# Altium PCB PCB1.PcbDoc
Units mm, origin at the board's own origin, x right, y up, seen from the top; angles counter-clockwise.
Board outline 58 x 22.4 mm, 2 copper layers (Top Layer, Bottom Layer); 53 components, 37 nets, 181 pads, 38 vias.
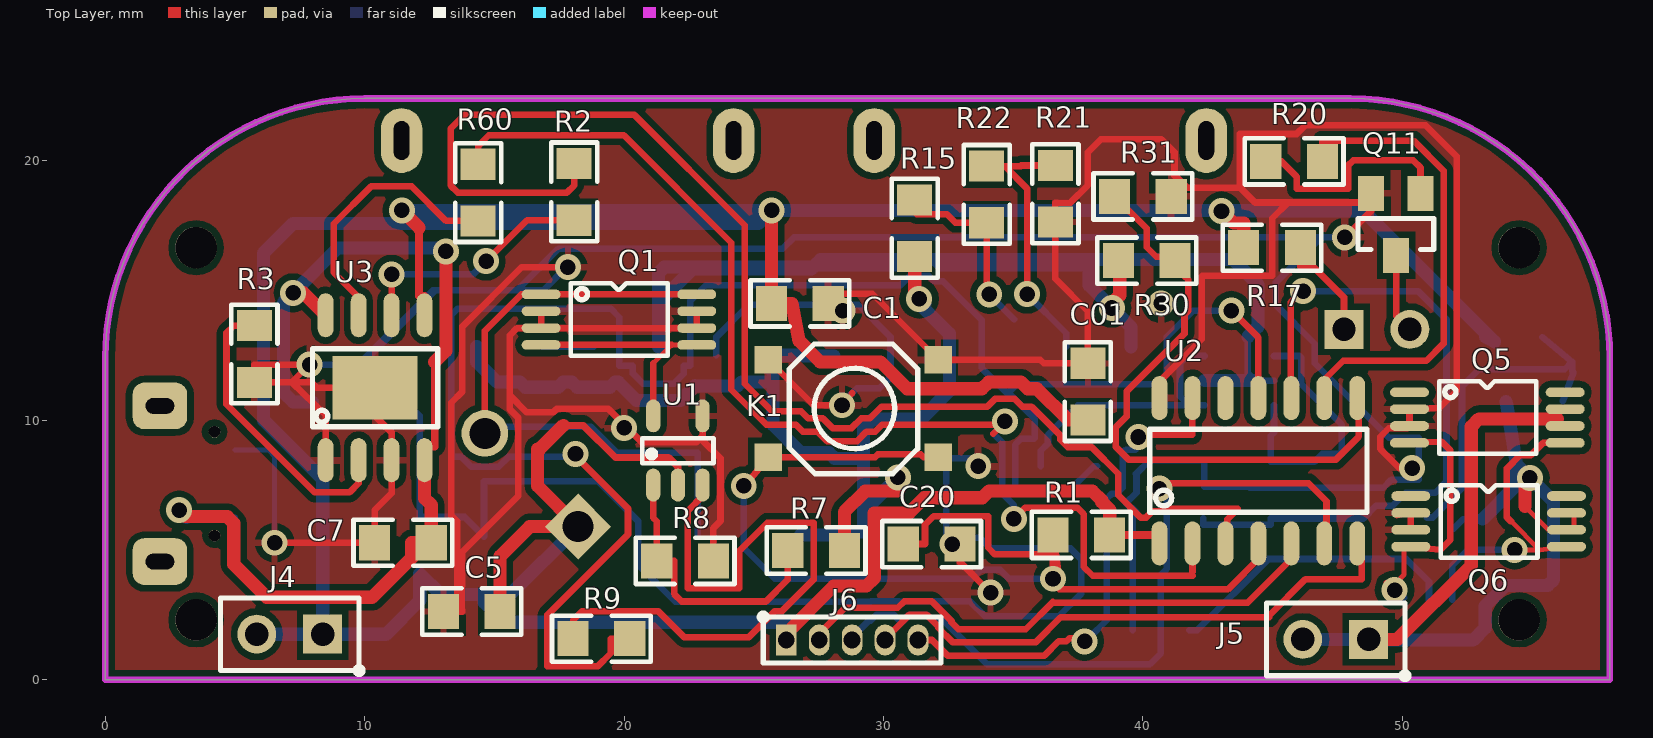
[diagram p0: Top Layer view]
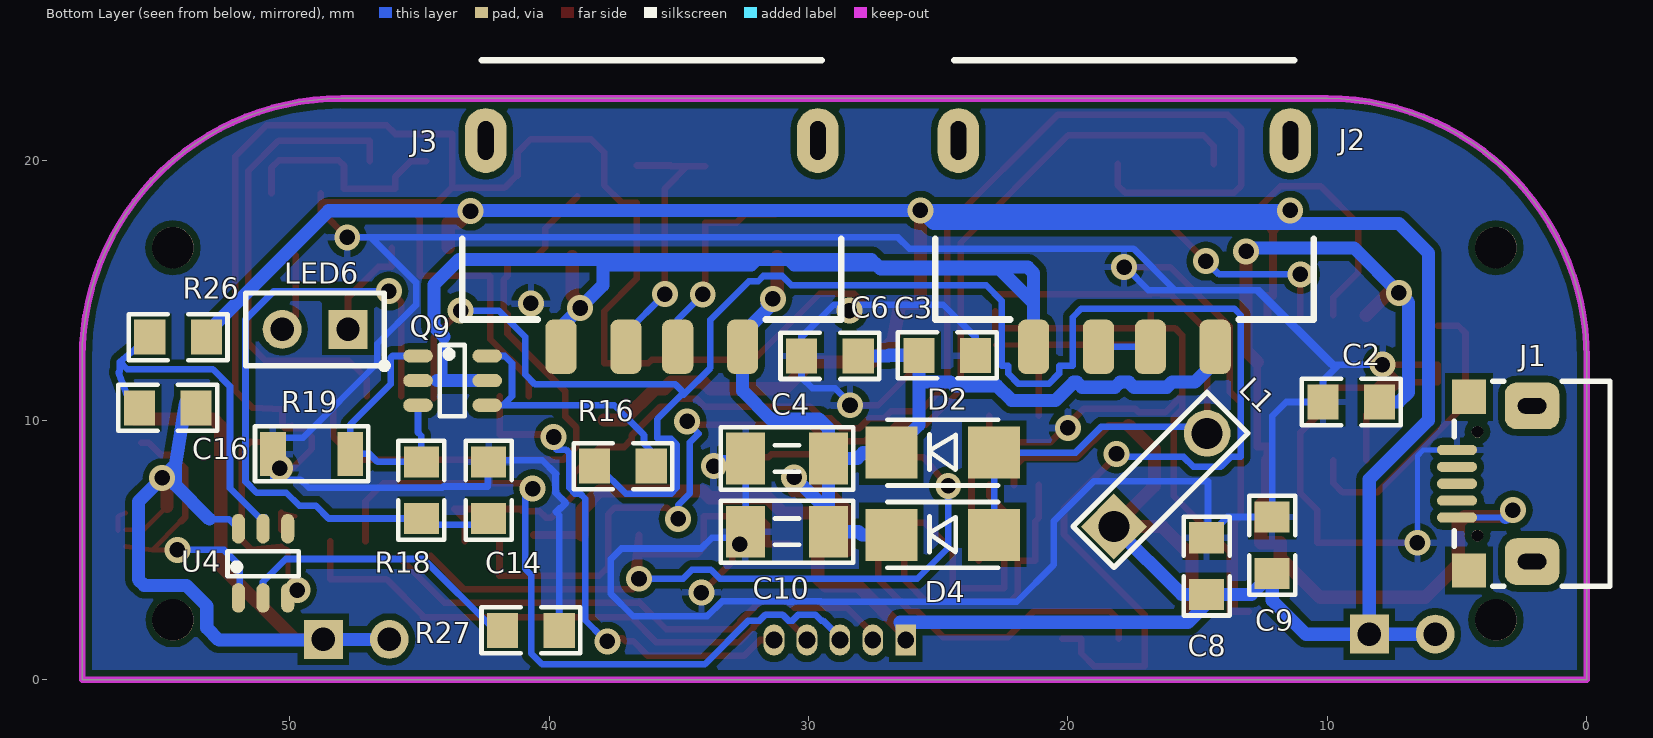
[diagram p1: Bottom Layer view, seen from below]

## Layer stack, top to bottom
Top Layer: signal copper 0.0356
Dielectric: dielectric 0.32, FR-4, Dk 4.8
Bottom Layer: signal copper 0.0356

## Board outline
0,0 58,0 58,12.4 ccw(c48,12.4) 48,22.4 10,22.4 ccw(c10,12.4) 0,12.4

## Design rules (kind name [scope] priority, off if disabled: settings)
Clearance [All] p1: gap=0.254
PolygonConnect [All] p1: connectstyle=Relief reliefconductorwidth=0.254 reliefentries=4 polygonreliefangle="90 Angle"
RoutingVias [All] p1: holewidth=0.6 width=1 viastyle="Through Hole" minholewidth=0.6 minwidth=1 maxholewidth=0.6 maxwidth=1
SMDNeckDown [All] p1: percent=50.000
SilkToSilkClearance [All] p1: silktosilkclearance=0.01
SilkscreenOverComponentPads [All] p1: minsilkscreentomaskgap=0.01
SolderMaskExpansion [All] p1: expansion=0.102
Width Width_Power [InNet('B+') or InNet('B-') or InNet('VBUS') or InNet('MiVCC') or InNet('T3') or InNet('T2') or InNet('VSWC')] p1: maxlimit=0.508 minlimit=0.508 preferedwidth=0.508 minimp=50.000000 maximp=50.000000 favimp=50.000000
Width [All] p2: maxlimit=0.254 minlimit=0.254 preferedwidth=0.254
26 further rules are at their usual default settings.

## Components (designator, comment, footprint, x,y, rotation, side; value= is the part's Value field where it differs from the comment)
C01 "10UF" 0805 37.875,11.1 r90 top locked
C1 "4.7UF" 0805 26.775,14.5 r0 top locked
C2 "120NF" 0805 9.075,10.7 r180 bottom locked
C3 "4.7UF" 0805 24.65,12.5 r0 bottom locked
C4 "47UF" 1210C 30.825,8.525 r0 bottom locked
C5 "120NF" 0805 14.125,2.625 r0 top locked
C6 "4.7UF" 0805 29.175,12.475 r180 bottom locked
C7 "4.7UF" 0805 11.475,5.275 r0 top locked
C8 "1.7UF" 0805 14.65,4.375 r270 bottom locked
C9 "4.7UF" 0805 12.125,5.175 r270 bottom locked
C10 "47UF" 1210C 30.825,5.7 r0 bottom locked
C14 "120NF" 0805 42.325,7.3 r270 bottom locked
C16 "120NF" 0805 54.7,10.475 r180 bottom
C20 "120NF" 0805 31.85,5.225 r180 top locked
D2 "1N5822" DO-214AA 24.825,8.75 r180 bottom locked
D4 "1N5822" DO-214AA 24.825,5.575 r180 bottom locked
J1 "miniusb" microusb4 5,7.55 r270 bottom locked
J2 "USB-A_1A" USB-A3 25.12,13.88 r180 bottom locked
J3 "USB-A_2A" USB-A3 43.34,13.88 r180 bottom locked
J4 "" PIN2 8.38,1.75 r180 top locked
J5 "" PIN2 48.7,1.55 r180 top locked
J6 "PIN5" PIN5_50 26.25,1.525 r0 top
K1 "SW-PB" KEY_Press0 28.83,10.45 r180 top locked
L1 "3.3UH" Inductor2 18.225,5.9 r135 bottom locked
LED6 "" PIN2 47.75,13.5 r0 bottom locked
Q1 "8205A_1" TSSOP8 19.8,13.875 r270 top locked
Q5 "8205A" TSSOP8 53.275,10.1 r270 top locked
Q6 "8205A" TSSOP8 53.325,6.1 r270 top locked
Q9 "8205S" SOT23-6 45.05,11.525 r270 bottom locked
Q11 "8050" SOT23 49.175,17.75 r0 top locked
R1 "10K" 0805 37.625,5.575 r0 top locked
R2 "1K" 0805 18.075,18.8 r90 top locked
R3 "1.3K" 0805 5.75,12.55 r90 top locked
R7 "100K" 0805 27.4,4.975 r0 top locked
R8 "33K" 0805 22.35,4.575 r180 top locked
R9 "1K" 0805 19.125,1.575 r180 top locked
R15 "120K" 0805 31.2,17.4 r90 top locked
R16 "1K" 0805 37.15,8.225 r180 bottom locked
R17 "100" 0805 44.975,16.65 r0 top locked
R18 "1K" 0805 44.925,7.3 r270 bottom locked
R19 "0.05R" 1206R 49.15,8.7 r180 bottom locked
R20 "1K" 0805 45.825,19.975 r180 top locked
R21 "100K" 0805 36.625,18.725 r90 top locked
R22 "39K" 0805 33.975,18.7 r270 top locked
R26 "100R" 0805 54.3,13.2 r180 bottom
R27 "1K" 0805 40.7,1.9 r0 bottom locked
R30 "1K" 0805 40.15,16.15 r0 top locked
R31 "43K" 0805 40,18.625 r0 top locked
R60 "1K" 0805 14.375,18.775 r90 top locked
U1 "ME2139" SOT23-5 22.075,7.5 r0 top locked
U2 "SN8P2711" SOP14 44.45,8.05 r0 top locked
U3 "AP5056" SOP8 10.4,11.25 r0 top locked
U4 "DW01" SOT23-6 51.025,3.15 r180 bottom

## Footprints (in the part's own frame and the unit in brackets; to place one, negate y for a bottom-side part, rotate by r counter-clockwise, add the part's x,y. Pads: shape width x height; smd on the part's side, far side on the other; paste and mask are expansions set on the pad)
0805 [mm]
  rect 1.2x1.35 smd: 1(-1.092,0) 2(1.092,0)
  silkscreen extent -1.9,-0.89 1.91,0.89
1206R [mm]
  rect 1x1.7 smd: 1(-1.486,0) 2(1.486,0)
  silkscreen extent -2.18,-1.05 2.18,1.07
1210C [mm]
  rect 1.5x2 smd: 1(-1.6,0) 2(1.6,0)
  silkscreen extent -2.55,-1.2 2.55,1.2
DO-214AA [mm]
  rect 2x2 smd: 1(1.981,0) 2(-1.981,0)
  silkscreen extent -2.13,-1.27 2.13,1.27
Inductor2 [mm]
  rect 1.8x1.8 hole 1.2: 1(0,0)
  round 1.8 hole 1.2: 2(5.08,0)
  silkscreen extent -1.12,-1.12 6.2,1.12
KEY_Press0 [mm]
  rect 1.05x1.05 smd: 1(-3.277,1.88) 1(3.277,1.88) 2(-3.277,-1.88) 2(3.277,-1.88)
  silkscreen extent -2.49,-2.49 2.46,2.51
microusb4 [mm]
  rect 1.32x1.32 smd: 0(-3.349,0.46) 0(3.349,0.46)
  rrect50% 1.8x2.1 hole 0.6 slot 1.1 at 90 deg: 0(-3,2.894) 0(3,2.894)
  oval 0.4x1.55 smd: 1(1.302,0) 3(0,0) 5(-1.302,0)
  oval 0.39x1.55 smd: 2(0.651,0) 4(-0.651,0)
  round 0.45 hole 0.45: Hole(-2,0.788) Hole(2,0.788)
  silkscreen extent -3.95,-0.11 3.95,5.89
PIN2 [mm]
  rect 1.5x1.5 hole 0.9: 1(0,0)
  round 1.5 hole 0.9: 2(2.54,0)
  silkscreen extent -1.53,-1.4 3.94,1.52
PIN5_50 [mm]
  rect 0.8x1.2 hole 0.65: 1(0,0)
  oval 0.8x1.2 hole 0.65: 2(1.27,0) 3(2.54,0) 4(3.81,0) 5(5.08,0)
  silkscreen extent -1.01,-0.89 5.97,1.01
SOP8 [mm]
  rect 3.28x2.45 smd: 0(0,0)
  oval 0.61x1.7 smd: 1(-1.905,-2.794) 2(-0.635,-2.794) 3(0.635,-2.794) 4(1.905,-2.794) 5(1.905,2.794) 6(0.635,2.794) 7(-0.635,2.794) 8(-1.905,2.794)
  silkscreen extent -2.41,-1.5 2.41,1.5
SOP14 [mm]
  oval 0.61x1.7 smd: 1(-3.81,-2.8) 2(-2.54,-2.8) 3(-1.27,-2.8) 4(0,-2.8) 5(1.27,-2.8) 6(2.54,-2.8) 7(3.81,-2.8) 8(3.81,2.8) 9(2.54,2.8) 10(1.27,2.8) 11(0,2.8) 12(-1.27,2.8) 13(-2.54,2.8) 14(-3.81,2.8)
  silkscreen extent -4.19,-1.6 4.19,1.6
SOT23 [mm] "NPN"
  rect 1x1.35 smd: 1(1.524,0.991) 2(-0.381,0.991) 3(0.584,-1.397)
  silkscreen extent -0.89,-1.17 2.03,0.03
SOT23-5 [mm]
  oval 0.55x1.27 smd: 1(-0.95,0) 2(0,0) 3(0.95,0) 4(0.95,2.667) 5(-0.95,2.668)
  silkscreen extent -1.37,0.84 1.37,1.8
SOT23-6 [mil]
  oval 20x45 smd: 1(-37.4,0) 2(0,0) 3(37.4,0) 4(37.4,105) 5(0,105) 6(-37.4,105)
  silkscreen extent -54,33 54,71
TSSOP8 [mm]
  oval 0.37x1.5 smd: 1(-0.975,-3) 2(-0.325,-3) 3(0.325,-3) 4(0.975,-3) 5(0.975,3) 6(0.325,3) 7(-0.325,3) 8(-0.975,3)
  silkscreen extent -1.4,-1.85 1.4,1.88
USB-A3 [mm]
  rrect50% 1.2x2.1 smd: 1(10.8,-1.05) 2(8.3,-1.05) 3(6.3,-1.05) 4(3.8,-1.05)
  oval 1.6x2.5 hole 0.6 slot 1.5 at 90 deg: ""(0.9,6.9) ""(13.7,6.9)
  silkscreen extent 0,0 14.6,10

## Part data
C01 C1 C2 C3 C4 C5 C6 C7 C8 C9 C10 C14 C16 C20: library part Cap, "Capacitor"
D2 D4: library part "Diode BAT18", "Low-Loss RF Switching Diode"
J2 J3: library part USB-A
J4 J5: library part "Header 2", "Header, 2-Pin"
K1: "Switch"
L1: library part Inductor, "Inductor"
LED6: library part LED0, "Typical INFRARED GaAs LED"
Q11: library part NPN, "NPN Bipolar Transistor"
R1 R2 R3 R7 R8 R9 R15 R16 R17 R18 R19 R20 R21 R22 R26 R27 R30 R31 R60: library part Res2, "Resistor"
U2: library part SN8P2711BSG

## Free pads (board coordinates)
  round 1.6 hole 1.6: 1(3.5,2.3) 2(54.5,2.3) 3(54.5,16.65) 4(3.5,16.65)

## Via types
v1: diameter 1, hole 0.6, Top Layer to Bottom Layer, 38 vias

## Nets (pads, with @x,y where several pads share a name; then routed paths per layer and width w, separated by ;. In a path a pad name is that pad's centre, name@x,y a point inside that pad or via, vN(x,y) a via of type N, cw(c..) or ccw(c..) an arc to the next point about the centre after c; other vN are vias at no path point)
B+: C01.1 C1.1 C5.2 C8.2 C9.2 J4.1 J4.2 J6.1 L1.1 R1.2 R17.1 R26.2 U1.2 U2.1 U3.5 | length 175.2
  Top Layer w0.275: 17.659,9.8 18.427,9.8 19.668,8.56 21.717,8.56 22.075,8.202 U1.2
  Top Layer w0.305: 12.098,17.417 12.098,14.78 12.305,14.78 U3.5 ; R1.2 U2.1@40.575,5.575
  Top Layer w0.508: v1(11.43,18.085) 12.098,17.417 ; C5.2 15.217,4.752 16.365,5.9 L1.1 16.662,7.463 16.662,8.89 16.749,8.89 17.659,9.8 ; v1(25.683,18.085) C1.1 26.47,14.5 26.746,13.055 27.559,12.242 29.887,12.242 30.917,11.211 33.794,11.211 34.049,11.466 35.305,11.466 35.56,11.211 35.912,11.211 37.115,10.008 C01.1 ; J6.1 26.25,1.775 28.082,3.607 29.337,3.607 29.642,3.912 29.642,6.426 30.988,6.426 31.572,7.01 33.803,7.01 34.06,7.266 38.055,7.266 38.409,6.912 38.409,6.847 38.717,6.539 R1.2 ; v1(43.028,18.059) 43.485,17.602 43.883,17.602 R17.1
  Bottom Layer w0.508: J4.2 J4.1 ; v1(11.43,18.085) v1(25.683,18.085) ; C8.2@14.6,2.977 15.367,2.21 26.46,2.21 J6.1 ; L1.1 15.608,3.283 C8.2 12.925,3.283 C9.2 12.125,3.048 10.827,1.75 J4.1 ; v1(43.028,18.059) 48.514,18.059 ; R26.2 53.548,13.025 48.514,18.059 ; J4.1 8.38,7.724 6.104,10 6.104,16.448 7.239,17.583 25.181,17.583 v1(25.683,18.085) ; v1(25.683,18.085) 48.489,18.085 48.514,18.059
B-: C16.2 J5.1 J5.2 Q5.6 Q5.7 Q6.6 Q6.7 U4.6 | length 40.5
  Top Layer w0.185: 54.725,6.678 55.628,5.775 Q6.6 ; Q6.7 56.617,6.3 Q6.6@56.617,5.75
  Top Layer w0.508: J5.1 49.81,1.55 52.654,4.394 52.654,9.754 52.951,10.05 55.975,10.05 ; 54.725,6.678 54.725,7.588 v1(54.912,7.775)
  Bottom Layer w0.254: U4.6 52.345,6.187 53.09,6.187
  Bottom Layer w0.508: J5.2 J5.1 48.726,1.524 52.724,1.524 53.192,1.992 53.192,2.842 53.98,3.63 55.605,3.63 55.829,3.854 55.829,6.858 v1(54.912,7.775) 54.408,8.279 ; 53.09,6.187 54.408,7.504 54.408,8.279 ; C16.2@54,10.725 54.03,10.545 54.408,8.279
GND: C1.2 C01.2 C2.1 C3.1 C4.2 C5.1 C6.1 C7.1 C8.1 C9.1 C10.2 C14.1 C20.1 J1.5 K1.2 Q1.2 Q1.3 Q1.6 Q1.7 Q5.2 Q5.3 Q6.2 Q6.3 Q11.2 R3.1 R8.1 R19.1 R21.1 R27.1 R31.2 U1.4 U2.14 U3.0 U3.1 U3.3 | length 302.5
  Top Layer w0.185: Q6.2@49.783,6.3 Q6.2 ; Q5.3@49.906,9.825 Q5.3
  Top Layer w0.254: v1(6.528,5.275) C7.1 10.383,6.528 11.035,7.18 U3.3 11.035,9.525 10.4,10.16 U3.0 8.158,11.25 7.95,11.458 7.191,11.458 ; U3.1 8.495,10.202 7.191,11.458 ; Q1.2 Q1.3 ; v1(17.831,15.9) 16.053,15.9 13.767,13.614 13.767,11.1 13.335,10.668 13.335,6.325 13.564,6.096 C5.1@13.564,2.625 ; Q1.7 Q1.6 Q1.3 ; U1.4 23.025,9.398 ; R8.1 23.442,5.84 23.717,6.115 23.717,8.528 23.025,9.22 23.025,9.398 ; K1.2@25.553,12.33 27.308,10.575 v1(28.4,10.575) ; C1.2 28.242,14.875 29.562,14.875 32.107,12.33 36.035,12.33 36.173,12.192 C01.2 37.875,14.2 36.625,15.45 R21.1 36.625,18.388 37.209,18.388 37.871,19.05 37.871,20.32 38.379,20.828 40.709,20.828 41.217,20.32 41.217,19.425 41.25,19.425 41.723,18.952 43.761,18.952 ; 28.776,11.026 28.801,11.05 ; C20.1 32.942,4.533 v1(34.125,3.35) ; U2.14@40.775,10.925 40.775,11.627 42.266,13.117 42.266,15.545 42.291,15.57 44.983,15.57 44.983,17.78 45.593,18.39 ; v1(47.778,17.043) 48.794,18.059 Q11.2@48.794,18.39 ; Q11.2 Q11.2@48.794,18.39 ; v1@49.885,8.15 49.144,8.891 49.144,9.359 49.476,9.691 50.191,9.691 Q5.3 Q5.2 51.435,10.475 52.095,11.135 52.095,20.168 50.902,21.361 46.253,21.361 45.923,21.031 43.739,21.031 43.739,18.974 43.761,18.952 ; Q6.3 Q6.2 ; 7.191,11.458 R3.1 5.75,12.141 v1(7.874,12.141) 7.191,11.458 ; C5.1@13.564,2.625 13.564,2.616 13.033,2.616 C5.1 C5.1@13.564,2.625 ; C5.1@13.564,2.625 13.767,2.625 13.767,4.928 15.926,7.087 15.926,10.084 15.596,10.414 15.596,10.947 ; 15.596,10.947 16.243,10.3 17.261,10.3 17.396,10.435 19.395,10.435 20.686,9.144 22.771,9.144 23.025,9.398 ; 15.596,10.947 15.596,13.271 15.875,13.55 Q1.3 ; 43.761,18.952 44.323,18.39 45.593,18.39 ; 45.593,18.39 Q11.2@48.794,18.39
  Bottom Layer w0.2: J1.5 6.299,8.852 6.528,8.623 v1(6.528,5.275)
  Bottom Layer w0.254: v1(7.874,12.141) 9.55,12.141 ; v1(17.831,15.9) 17.78,15.9 16.891,15.011 15.875,15.011 ; C3.1 23.558,13.208 24.803,14.453 29.022,14.453 30.267,13.208 C6.1 30.267,11.649 29.845,11.227 28.978,11.227 v1@28.363,10.612 ; v1(33.65,8.225) 33.35,8.525 C4.2 C10.2 32.425,5.461 33.731,5.461 34.138,5.055 37.211,5.055 37.617,4.648 37.617,3.302 36.754,2.438 33.909,2.438 33.333,3.014 30.796,3.014 30.779,2.997 30.611,2.997 30.594,3.014 29.526,3.014 29.509,2.997 21.971,2.997 20.549,4.42 20.549,6.096 18.995,7.65 14.6,7.65 14.6,5.517 13.85,6.267 C9.1 12.125,10.16 11.585,10.7 C2.1 10.167,11.525 9.55,12.141 ; R27.1 39.608,6.339 39.731,6.462 39.599,6.594 39.56,6.594 39.352,6.802 39.731,7.182 ; 39.731,7.93 39.75,7.949 ; 39.75,7.202 39.75,7.949 ; C14.1 C14.1@42.342,8.392 ; v1(47.778,17.043) 46.863,17.043 ; 9.55,12.141 9.754,12.141 ; 9.754,12.141 9.855,12.141 12.725,15.011 ; 9.754,12.141 12.624,15.011 12.725,15.011 ; 12.725,15.011 15.875,15.011 ; 15.875,15.011 17.475,16.612 26.111,16.612 26.543,17.043 46.863,17.043 ; 39.75,7.949 40.259,8.458 42.342,8.458 C14.1@42.342,8.392 ; C14.1@42.342,8.392 42.367,8.392 42.367,7.442 44.069,7.442 44.12,7.391 49.266,7.391 49.586,7.711 50.636,7.711 R19.1 50.636,9.325 49.486,9.325 46.619,12.192 46.619,12.944 45.125,14.438 45.125,15.305 46.863,17.043
  other v1: 32.65,5.225 50.375,8.15 20,9.7 28.425,14.225 40.7,14.5
MIVCC: C2.2 C7.2 J1.1 U3.4 U3.8 | length 41
  Top Layer w0.305: U3.4 12.305,8.992 12.701,8.992 12.701,12.244
  Top Layer w0.508: v1(2.846,6.533) 3.096,6.283 4.699,6.283 4.953,6.029 4.953,4.445 6.223,3.175 10.287,3.175 11.811,4.699 11.811,5.275 C7.2 12.567,6.731 12.305,6.993 U3.4 ; v1(7.239,14.91) 7.629,14.91 U3.8 ; 12.701,12.244 13.132,12.675 v1(13.132,16.51)
  Bottom Layer w0.23: v1@3.131,6.248 J1.1
  Bottom Layer w0.508: v1(2.846,6.533) v1@3.131,6.248 ; C2.2 7.239,10.7 6.866,11.073 6.866,14.537 v1(7.239,14.91) 8.966,16.637 13.005,16.637 v1(13.132,16.51)
NetC16_1: C16.1 R26.1 U4.5 | length 13.5
  Bottom Layer w0.254: U4.5@50.95,6.25 51.175,6.25 52.299,7.374 52.299,11.303 52.959,11.963 56.261,11.963 56.542,12.244 ; R26.1 56.542,12.244 ; C16.1@56.185,10.725 56.592,11.836 56.542,11.886 56.542,12.244
NetD2_1: D2.1 D4.1 L1.2 Q1.1 Q1.8 | length 24.6
  Top Layer w0.185: Q1.1@16.4,14.85 Q1.1
  Top Layer w0.254: L1.2 14.633,13.448 16.035,14.85 Q1.1@16.4,14.85 ; Q1.1 Q1.8
  Bottom Layer w0.254: L1.2 14.891,9.75 18.704,9.75 19.704,8.75 D2.1 D4.1
NetJ2_2: J2.2 J2.3 | length 2
  Bottom Layer w0.254: J2.2 J2.3
NetJ3_2: J3.2 R15.2 R22.2 | length 6.9
  Top Layer w0.254: R15.2@31.275,17.942 32.436,17.942 32.77,17.608 R22.2 v1@33.975,14.95
  Bottom Layer w0.254: v1(34.075,14.85) 35.04,13.885
NetJ3_3: J3.3 R21.2 R22.1 | length 10.6
  Top Layer w0.254: R22.1 34.671,19.792 ; v1(35.535,14.859) 35.535,18.928 34.671,19.792 ; R21.2 35.306,19.817 35.281,19.792 34.671,19.792
  Bottom Layer w0.254: v1(35.535,14.859) 37.04,13.353 J3.3
NetLED6_1: LED6.1 R17.2 | length 4.1
  Top Layer w0.254: R17.2 46.067,15.907 46.575,15.907 47.75,14.732 LED6.1
NetLED6_2: LED6.2 Q11.3 | length 3.1
  Top Layer w0.254: Q11.3 49.759,14.031 LED6.2
NetQ1_4: Q1.4 Q1.5 U1.5 | length 9
  Top Layer w0.185: 21.125,12.192 21.833,12.9 Q1.5
  Top Layer w0.254: Q1.4 21.833,12.9 ; U1.5 21.125,12.192
NetQ5_4: Q5.4 Q6.4 U4.3 | length 9.7
  Top Layer w0.185: v1@49.362,3.738 49.763,3.738 50.063,4.038 50.063,5 Q6.4
  Top Layer w0.254: Q5.4 51.506,9.175 51.85,8.831 51.85,5.393 51.457,5 Q6.4
  Bottom Layer w0.254: v1@49.625,3.708 49.625,3.6 U4.3
  other v1: 49.7,3.45
NetQ5_5: Q5.5 Q6.5 U4.1 | length 11.7
  Top Layer w0.185: 54.189,6.096 55.285,5 ; v1(54.331,5) 55.285,5 ; Q6.5 55.285,5
  Top Layer w0.254: 54.189,6.096 54.031,6.254 54.031,8.14 54.547,8.656 54.956,8.656 55.425,9.125 Q5.5@55.725,9.125
  Bottom Layer w0.254: U4.1@51.925,3.075 51.925,4.4 52.525,5 v1(54.331,5)
NetQ9_1: Q9.1 Q9.3 R18.1 R19.2 | length 10.5
  Bottom Layer w0.254: Q9.3 45.05,9.523 44.925,9.398 R18.1 46.609,8.392 46.917,8.7 R19.2 47.664,9.831 46.107,11.387 46.107,12.403 46.035,12.475 Q9.1
NetQ9_4: Q9.4 Q9.6 R16.2 | length 10.7
  Bottom Layer w0.254: R16.2 36.058,8.818 36.339,9.1 36.339,9.425 37.489,10.575 41.774,10.575 ; Q9.4 41.774,10.575 ; Q9.6 41.71,12.475 41.427,12.192 41.427,10.922 41.774,10.575
NetQ11_1: Q11.1 R20.2 | length 8.8
  Top Layer w0.254: R20.2 45.339,19.975 45.923,19.391 45.923,18.919 47.904,18.919 47.904,19.812 48.107,20.015 50.419,20.015 50.699,19.735 Q11.1
NetR2_1: R2.1 U3.6 | length 9.5
  Top Layer w0.254: U3.6 v1(11.035,15.621) ; v1(14.681,16.129) 16.26,17.708 R2.1
  Bottom Layer w0.254: v1(11.035,15.621) 14.173,15.621 v1(14.681,16.129)
NetR3_2: R3.2 U3.2 | length 11.5
  Top Layer w0.254: R3.2 4.953,13.642 4.674,13.363 4.674,10.617 8.077,7.214 9.409,7.214 9.765,7.569 U3.2
NetR7_1: R7.1 R8.2 U1.1 | length 10.9
  Top Layer w0.254: U1.1 21.125,6.235 21.258,6.102 R8.2 21.927,4.575 21.927,3.302 22.218,3.011 25.465,3.011 26.308,3.854 R7.1
NetR9_2: R9.2 U1.3 | length 24.6
  Top Layer w0.254: R9.2 18.033,2.286 18.388,2.642 21.308,2.642 22.325,1.625 24.797,1.625 25.814,2.642 26.092,2.642 27.305,3.855 27.305,6.045 25.527,6.045 24.435,4.953 24.435,3.519 22.454,3.519 22.454,6.502 23.025,7.074 U1.3
NetR27_2: R27.2 U4.2 | length 11.4
  Bottom Layer w0.254: R27.2 42.088,1.9 44.836,4.648 50.152,4.648 51.025,3.775 U4.2@51.025,3.075
NetR30_2: R30.2 R31.1 U2.8 | length 24.1
  Top Layer w0.254: R31.1 40.144,17.389 40.144,16.669 40.513,16.3 41.6,16.3 41.6,15.559 41.75,15.409 41.75,14.228 41.6,14.078 41.6,13.338 39.37,11.108 39.37,10.141 38.944,9.715 38.944,8.985 39.46,8.469 47.422,8.469 48.325,9.372 U2.8@48.325,10.925
NetR60_1: R60.1 U3.7 | length 10.6
  Top Layer w0.254: U3.7 9.765,14.74 8.808,15.697 8.808,17.571 10.247,19.01 11.811,19.01 13.138,17.683 R60.1
P0.1: J6.4 U2.7 | length 21.7
  Top Layer w0.254: J6.4 30.27,1.898 30.399,1.898 31.006,2.506 31.653,2.506 32.111,2.048 32.111,2.001 32.679,1.433 35.858,1.433 36.825,2.4 44.87,2.4 ; 44.87,2.475 46.27,3.875 48.427,3.875 U2.7@48.427,5.325
P0.2: R2.2 U2.3 | length 51.7
  Top Layer w0.254: R2.2 18.075,19.05 17.796,18.771 13.589,18.771 13.31,19.05 13.31,21.234 13.843,21.768 20.396,21.768 24.647,17.517 24.647,11.405 25.706,10.346 26.819,10.346 27.098,10.067 27.662,10.067 28.035,9.694 28.765,9.694 29.138,10.067 29.472,10.067 29.93,10.525 34.005,10.525 34.312,10.831 35.042,10.831 35.348,10.525 35.7,10.525 36.819,9.406 36.819,9.25 37.103,8.966 38.012,8.966 39.044,7.934 39.044,7.11 39.91,6.244 40.119,6.244 40.356,6.481 40.924,6.481 41.002,6.481 41.096,6.575 43.653,6.575 43.25,6.172 U2.3@43.25,5.325
P0.3: R60.2 U2.2 | length 45.1
  Top Layer w0.254: R60.2 14.375,20.574 14.781,20.98 19.99,20.98 24.13,16.84 24.13,11.176 25.476,9.83 26.616,9.83 26.887,9.559 27.452,9.559 27.825,9.186 28.975,9.186 29.348,9.559 29.683,9.559 29.953,9.83 v1@34.677,9.83 ; 34.227,9.475 34.677,9.925 v1(34.677,9.95) ; v1(35.027,6.198) 35.46,6.631 37.465,6.631 37.719,6.377 37.719,4.343 38.062,4 41.91,4 ; 41.91,4.16 U2.2@41.91,5.325
  Bottom Layer w0.254: 34.227,9.475 34.677,9.925 v1(34.677,9.95) ; 34.241,9.475 34.569,9.148 34.569,7.182 35.027,6.724 v1(35.027,6.198)
P4.0: R20.1 U2.9 | length 18.4
  Top Layer w0.254: R20.1 46.917,20.777 50.424,20.777 51.587,19.613 51.587,12.954 50.927,12.294 47.719,12.294 47.025,11.6 U2.9@47.025,10.925
P4.1: C14.2 R18.2 U2.10 | length 27.6
  Top Layer w0.254: U2.10@45.7,10.925 45.7,14.55 46.017,14.867 46.175,14.709 v1(46.175,14.975)
  Bottom Layer w0.254: C14.2 42.325,5.961 44.925,5.961 R18.2 48.499,6.208 48.997,6.706 49.631,6.706 50.128,7.203 51.272,7.203 51.703,7.634 51.703,13.88 50.608,14.975 46.441,14.975 46.175,14.709 v1(46.175,14.975)
P4.2: R9.1 R16.1 U2.11 | length 78.1
  Top Layer w0.254: v1@18.143,8.603 20.15,6.596 20.15,5.596 17.043,2.489 17.043,0.508 18.974,0.508 19.482,1.016 19.482,1.575 R9.1 ; v1(43.409,14.224) 44.45,13.183 U2.11
  Bottom Layer w0.254: v1@18.125,8.585 15.538,8.585 15.164,8.211 14.102,8.211 13.728,8.585 13.335,8.585 13.335,14.046 13.589,14.3 19.482,14.3 19.812,13.97 19.812,12.102 20.339,12.102 20.339,11.798 20.738,11.399 21.902,11.399 22.301,11.798 22.301,12.102 22.555,12.102 22.555,14.605 23.15,15.2 30.654,15.2 31.01,15.556 31.74,15.556 31.939,15.357 32.294,15.357 33.782,13.868 33.782,12.014 34.815,10.981 ; R16.1 38.1,8.225 37.038,7.163 35.414,7.163 35.408,7.169 35.3,7.169 35.077,7.392 35.077,9.058 35.3,9.281 35.802,9.281 35.831,9.31 35.831,10.042 34.892,10.981 34.815,10.981 ; v1(43.409,14.224) 41.935,14.224 40.919,13.208 40.919,11.76 40.538,11.379 35.128,11.379 34.815,11.066 34.815,10.981
  other v1: 18.125,8.7
P4.3: U2.12
P4.4: J6.5 U2.13 | length 21.2
  Top Layer w0.254: J6.5 31.869,1.525 32.469,0.925 36.199,0.925 36.749,1.475 37.05,1.475 37.175,1.6 37.975,1.6 38.1,1.475 v1(37.75,1.475) ; v1(39.825,9.35) 39.923,9.448 41.9,9.448 U2.13@41.9,10.925
  Bottom Layer w0.254: v1(37.75,1.475) 38.047,1.475 37.922,1.6 38.608,2.286 38.608,6.972 38.805,7.169 39,7.169 39.223,7.392 39.223,8.737 39.35,8.864 39.7,8.864 40.159,9.448 40.061,9.35 v1(39.825,9.35)
P5.3: J6.2 U2.5 | length 20.7
  Top Layer w0.254: J6.2 27.73,1.723 27.73,1.98 28.519,2.769 30.551,2.769 30.796,3.014 31.864,3.014 32.619,2.259 32.619,2.212 32.89,1.941 35.481,1.941 36.529,2.989 ; 36.529,2.964 44.034,2.964 U2.5@45.81,4.74
P5.4: J6.3 U2.6 | length 28.5
  Top Layer w0.254: v1@40.63,7.363 40.63,7.375 40.825,7.569 46.38,7.569 47.075,6.875 U2.6@47.075,5.325
  Bottom Layer w0.254: J6.3 29,1.829 29.444,2.273 29.504,2.273 29.736,2.506 30.383,2.506 30.616,2.273 30.774,2.273 31.006,2.506 31.653,2.506 31.886,2.273 32.312,2.273 33.991,0.594 40.269,0.594 40.691,1.016 40.691,4.039 40.919,4.267 v1@40.919,7.569
  other v1: 40.631,7.362
RST: C20.2 K1.1 R1.1 U2.4 | length 43.2
  Top Layer w0.254: v1(24.613,7.468) 24.816,7.671 25.553,8.57 29.675,8.57 29.784,8.679 31.437,8.679 31.546,8.57 K1.1@32.107,8.57 ; C20.2 31.598,5.225 31.598,5.969 31.928,6.299 34.036,6.299 34.036,5.08 34.29,4.826 36.533,4.826 ; v1(36.533,3.886) 36.533,4.826 ; v1@36.782,3.475 43.275,3.475 U2.4@44.562,4.763 ; v1@36.782,3.525 36.782,3.924 R1.1 36.533,4.826
  Bottom Layer w0.254: v1(24.613,7.468) 24.613,5.08 25.806,3.886 33.415,3.886 33.76,4.231 34.49,4.231 34.835,3.886 v1(36.533,3.886)
T3: J2.4 J3.4 Q9.2 Q9.5 R30.1 | length 56.4
  Top Layer w0.508: v1(38.8,14.325) 38.8,14.501 39.108,14.809 R30.1@39.108,16.3
  Bottom Layer w0.254: 44.044,13.216 44.044,11.804 44.323,11.525 Q9.2
  Bottom Layer w0.508: J2.4 21.32,14.502 ; J3.4 39.54,13.585 v1(38.8,14.325) 37.926,15.199 37.926,15.992 32.202,15.992 32.003,16.191 30.747,16.191 30.548,15.992 27.375,15.992 ; Q9.5 44.323,11.525 ; 44.044,13.216 44.431,13.604 44.431,15.232 43.472,16.191 27.574,16.191 27.375,15.992 ; 21.32,14.502 21.32,15.672 21.549,15.9 27.284,15.9 ; 21.32,14.502 22.653,15.835 27.218,15.835 27.284,15.9 ; 27.284,15.9 27.375,15.992
VBUS: C3.2 C4.1 C6.2 C10.1 D2.2 D4.2 J2.1 J3.1 R7.2 R15.1 | length 44.7
  Top Layer w0.508: R7.2 28.492,6.462 29.294,7.264 30.531,7.264 30.556,7.29 v1(30.556,7.798) ; v1@31.2,14.877 R15.1
  Bottom Layer w0.508: J2.1 14.32,12.248 15.101,11.467 15.99,11.467 16.185,11.272 17.455,11.272 17.65,11.467 17.99,11.467 18.185,11.272 19.455,11.272 19.65,11.467 19.772,11.467 20.475,10.764 22.165,10.764 22.733,11.332 22.748,11.317 24.368,11.317 24.519,11.467 25.742,11.467 ; D4.2 27.94,5.575 28.065,5.7 C10.1 C10.1@29.225,6.467 ; C6.2 26.924,12.475 26.899,12.5 C3.2 25.742,11.467 ; v1(30.556,7.798) C10.1@29.225,6.467 ; v1(31.375,14.675) 31.402,14.675 31.602,14.476 31.401,14.476 32.54,13.336 J3.1 32.54,11.128 31.445,10.033 29.591,10.033 29.225,9.667 C4.1 ; 25.742,11.467 25.742,9.814 D2.2 27.889,8.75 28.114,8.525 C4.1 ; C10.1@29.225,6.467 C4.1
pads on no net: J1.0 J1.2 J1.3 J1.4 J1.Hole J2. J3. Q5.1 Q5.8 Q6.1 Q6.8 U4.4

## Polygon pours and split planes (outlines as drawn)
GND on Bottom Layer "Top Layer-No Net" (solid, remove dead copper, pour order 12): 60.2,-2 59.6,-1.4 59.6,26.85 0.2,26.85 -1.65,25 -4.45,22.2 -4.45,-5.375
GND on Bottom Layer "Top Layer-No Net" (solid, remove dead copper, pour order 8): 60.4,4.9 60.4,-4.9 60.925,-5.425
GND on Top Layer "Top Layer-No Net" (solid, remove dead copper, pour order 14): 59.725,-3.775 59.725,24.25 57.325,26.65 55.725,25.05 -3.575,25.05 -3.575,-1.15 -4.1,-1.675

## Keep-outs
Keep-Out Layer:
  the board outline again, w0.254